# EAGLE board Galvanometer (EAGLE 9.6.2)
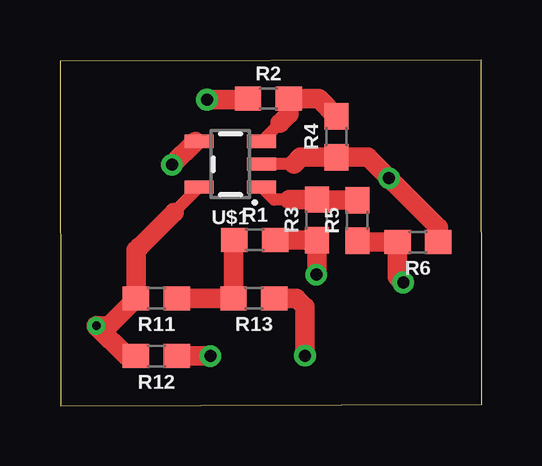
[diagram p0: board, top side]
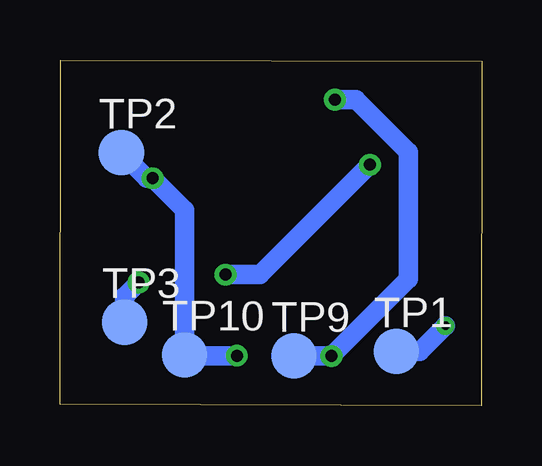
[diagram p1: board, bottom side, seen from below]

Size 17.6 x 14.42 mm. Coordinates in mm from the lower left corner, seen from the top.
Outline: 0.03,0 17.6,0.05 17.57,14.42 0,14.37 0.03,0
Copper layers (1*16): Top 0.035mm / dielectric 1.5mm / Bottom 0.035mm
Design rules "default": minimum track width 6mil, minimum drill 0.35mm, track to track 6mil, track to pad 6mil, pad to pad 6mil, via to via 6mil, smd to smd 6mil, copper to edge 40mil, drill to drill 6mil, minimum pad ring 10mil, minimum via ring 8mil, stop-mask expansion 4mil, vias tented up to drill 0mil, thermal gap 10mil

## Footprints (pad centres in the part's own frame; a part is rotated, then mirrored left to right if it is on the bottom)
0603 = smd 1.1 x 1: 1 -0.85,0; 2 0.85,0
TP19R = smd 1.9 x 1.9: TP 0,0
SOT23-5 = smd 0.55 x 1.2: 1 -0.95,-1.3; 2 0,-1.3; 3 0.95,-1.3; 4 0.95,1.3; 5 -0.95,1.3

## Placement (x,y rotation side)
R1  1M  [0603]  8.12,6.9 0 top
R2  1M  [0603]  8.69,12.8 0 top
R3  2.2M  [0603]  10.71,7.74 90 top
R4  2.2M  [0603]  11.54,11.21 90 top
R5  3M  [0603]  12.4,7.72 90 top
R6  5.1M  [0603]  14.93,6.82 180 top
R11  150k  [0603]  4.02,4.48 180 top
R12  150k  [0603]  4.02,2.06 180 top
R13  5.1M  [0603]  8.09,4.48 180 top
TP1  TPTP19R  [TP19R]  3.56,2.25 0 bottom
TP2  TPTP19R  [TP19R]  15.03,10.54 0 bottom
TP3  TPTP19R  [TP19R]  14.89,3.48 0 bottom
TP9  TPTP19R  [TP19R]  7.83,2.06 0 bottom
TP10  TPTP19R  [TP19R]  12.39,2.12 0 bottom
U$1  OPA344  [SOT23-5]  7.11,10.07 90 top

## Library data of the parts
R1-R6 = SparkFun-Resistors
R11-R13 = SparkFun-Resistors; PROD_ID: RES-00824
TP1-TP3 TP9 TP10 = testpad
U$1 = SparkFun-IC-Amplifiers; PROD_ID: IC-08251

## Nets
1.8V: R11.2 R12.2 TP1.TP U$1.5
A0: R5.1 R6.2 TP3.TP
GND: R4.1 R6.1 R13.1 TP2.TP TP10.TP U$1.2
N$2: R1.2 R3.1 U$1.4
N$10: R2.2 R4.2 U$1.3
N$12: R3.2 R5.2 U$1.1
V1: R1.1 R11.1 R13.2
V2: R2.1 R12.1 TP9.TP

## Tracks (layer width: path | path; a pad name or v marks a point on that pad's centre or on a via)
1.8V  (via drill 0.35)
  Top 0.508: U$1.5 4.76,8.07 4.76,8.06
  Top 0.813: R12.2 2.78,2.06 v1.52,3.33 2.02,3.33 R11.2 3.17,6.49 3.29,6.61 3.32,6.61 4.76,8.06
  Bottom 0.813: v1.52,3.33 2.59,2.25 TP1.TP
A0  (via drill 0.5)
  Top 0.813: R5.1 12.45,6.82 R6.2 14.08,5.37 v14.31,5.13
  Bottom 0.813: 14.89,3.65 TP3.TP 14.89,4.55 v14.31,5.13
GND  (via drill 0.5)
  Top 0.508: 9.75,10.08 9.74,10.07 U$1.2
  Top 0.813: R13.1 9.86,4.48 10.22,4.12 v10.22,2.08 | 9.75,10.08 10.04,10.36 R4.1 12.85,10.36 v13.73,9.48 15.78,7.43 R6.1
  Bottom 0.813: TP10.TP 12.25,2.12 | TP10.TP 12.36,2.08 v10.22,2.08 | TP10.TP 12.39,8.15 v13.73,9.48 13.97,9.48 TP2.TP
N$2  (via drill 0.5)
  Top 0.152: U$1.4 5.65,11.02
  Top 0.813: R1.2 10.71,6.9 R3.1 10.71,5.49 v10.69,5.46 | 5.65,11.02 v4.67,10.04
  Bottom 0.813: v10.69,5.46 9.25,5.46 v4.67,10.04
N$10
  Top 0.508: 9.18,11.79 U$1.3
  Top 0.813: R4.2 10.8,12.8 R2.2 9.54,12.15 9.18,11.79
N$12
  Top 0.152: R5.2 10.74,8.57 R3.2 10.64,8.59
  Top 0.508: 9.58,8.59 8.93,8.59 U$1.1
  Top 0.813: R5.2 10.66,8.57 10.64,8.59 | R3.2 9.58,8.59
V1
  Top 0.813: R1.1 7.24,6.87 R13.2 R11.1
V2  (via drill 0.5)
  Top 0.813: R12.1 v6.27,2.07 | R2.1 7.81,12.76 v6.13,12.76
  Bottom 0.152: v6.13,12.76 6.13,12.47
  Bottom 0.508: v6.27,2.06 v6.27,2.07
  Bottom 0.813: TP9.TP v6.27,2.06 3.06,5.28 3.06,10.58 5.25,12.76 v6.13,12.76